# Altium PCB PCB2.PcbDoc
Units mil, origin at the board's own origin, x right, y up, seen from the top; angles counter-clockwise.
Board outline 2685 x 2175 mil, 2 copper layers (Top Layer, Bottom Layer); 49 components, 31 nets, 131 pads, 0 vias.
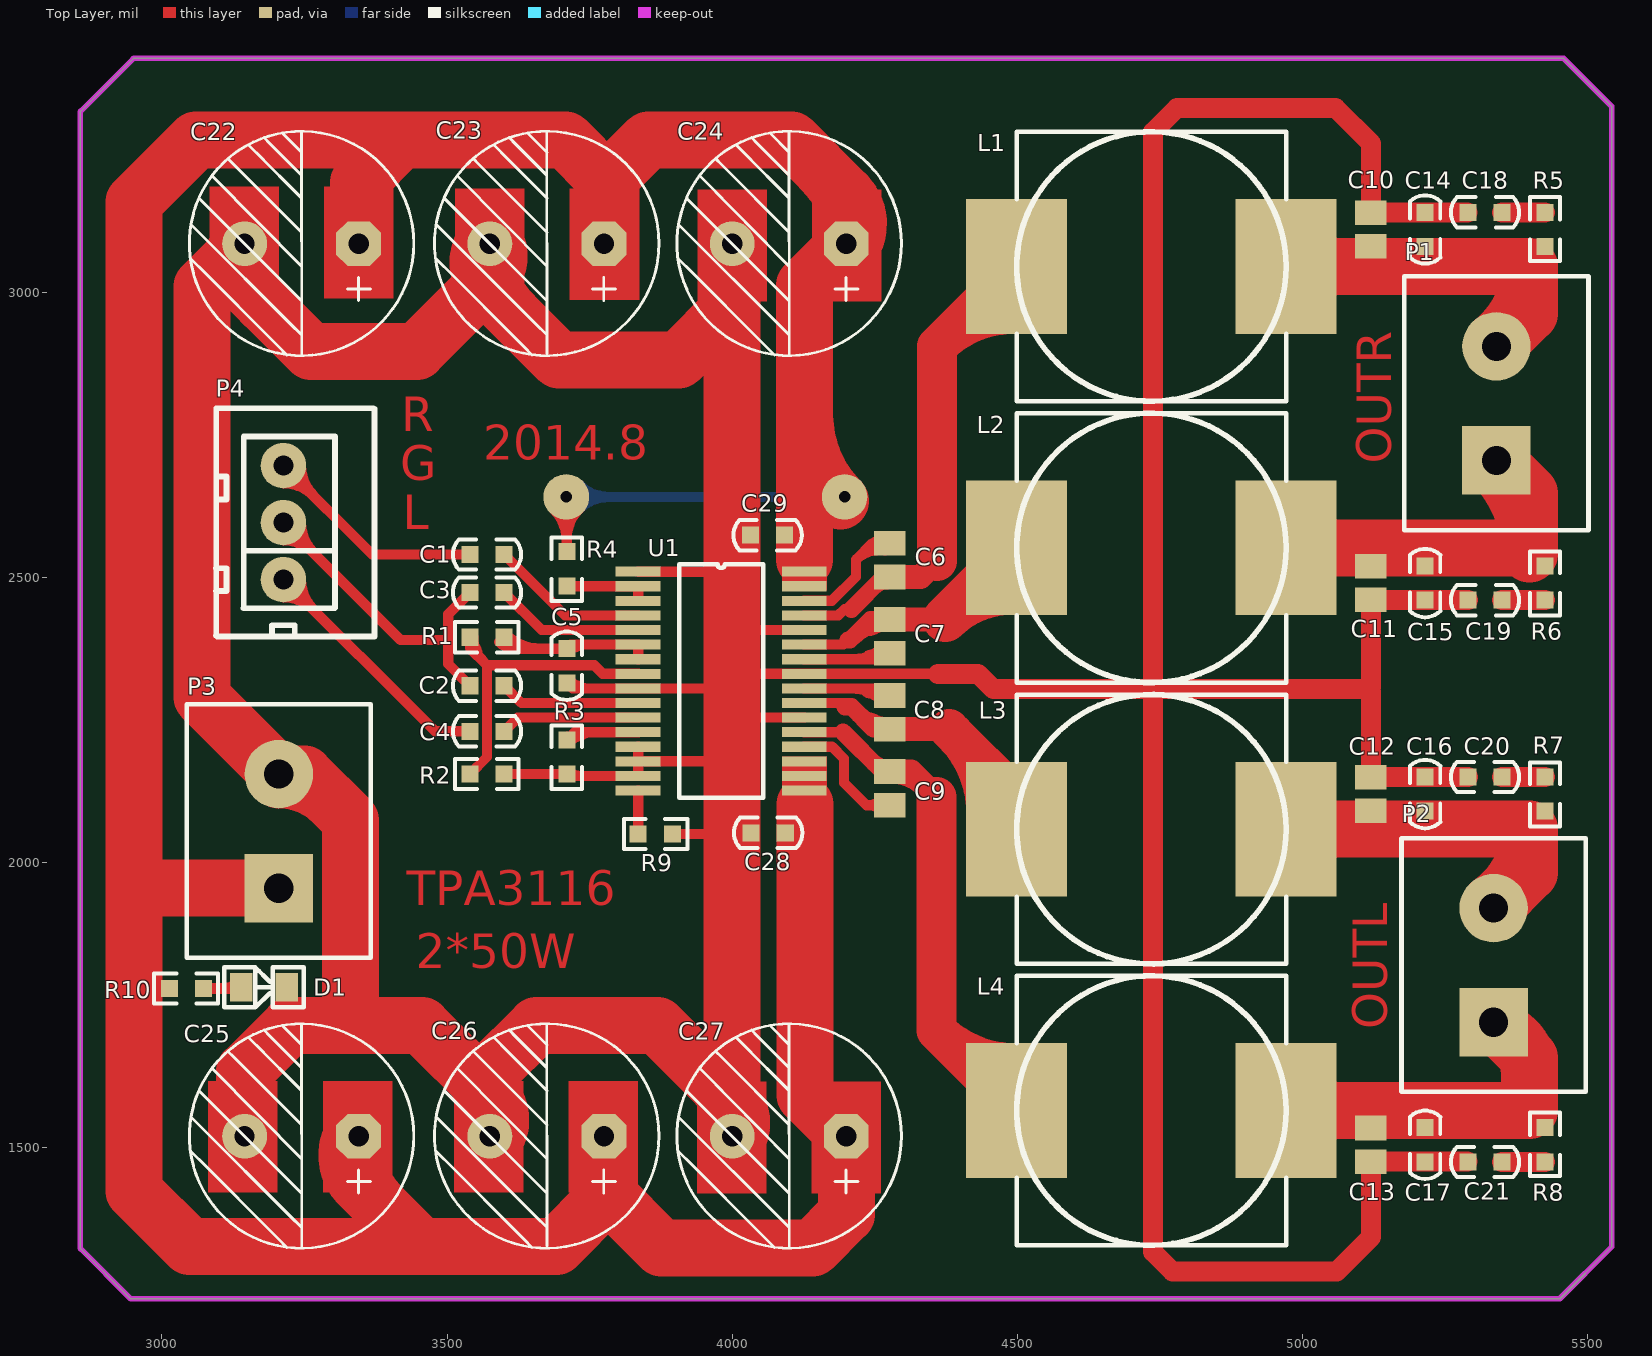
[diagram p0: Top Layer view]
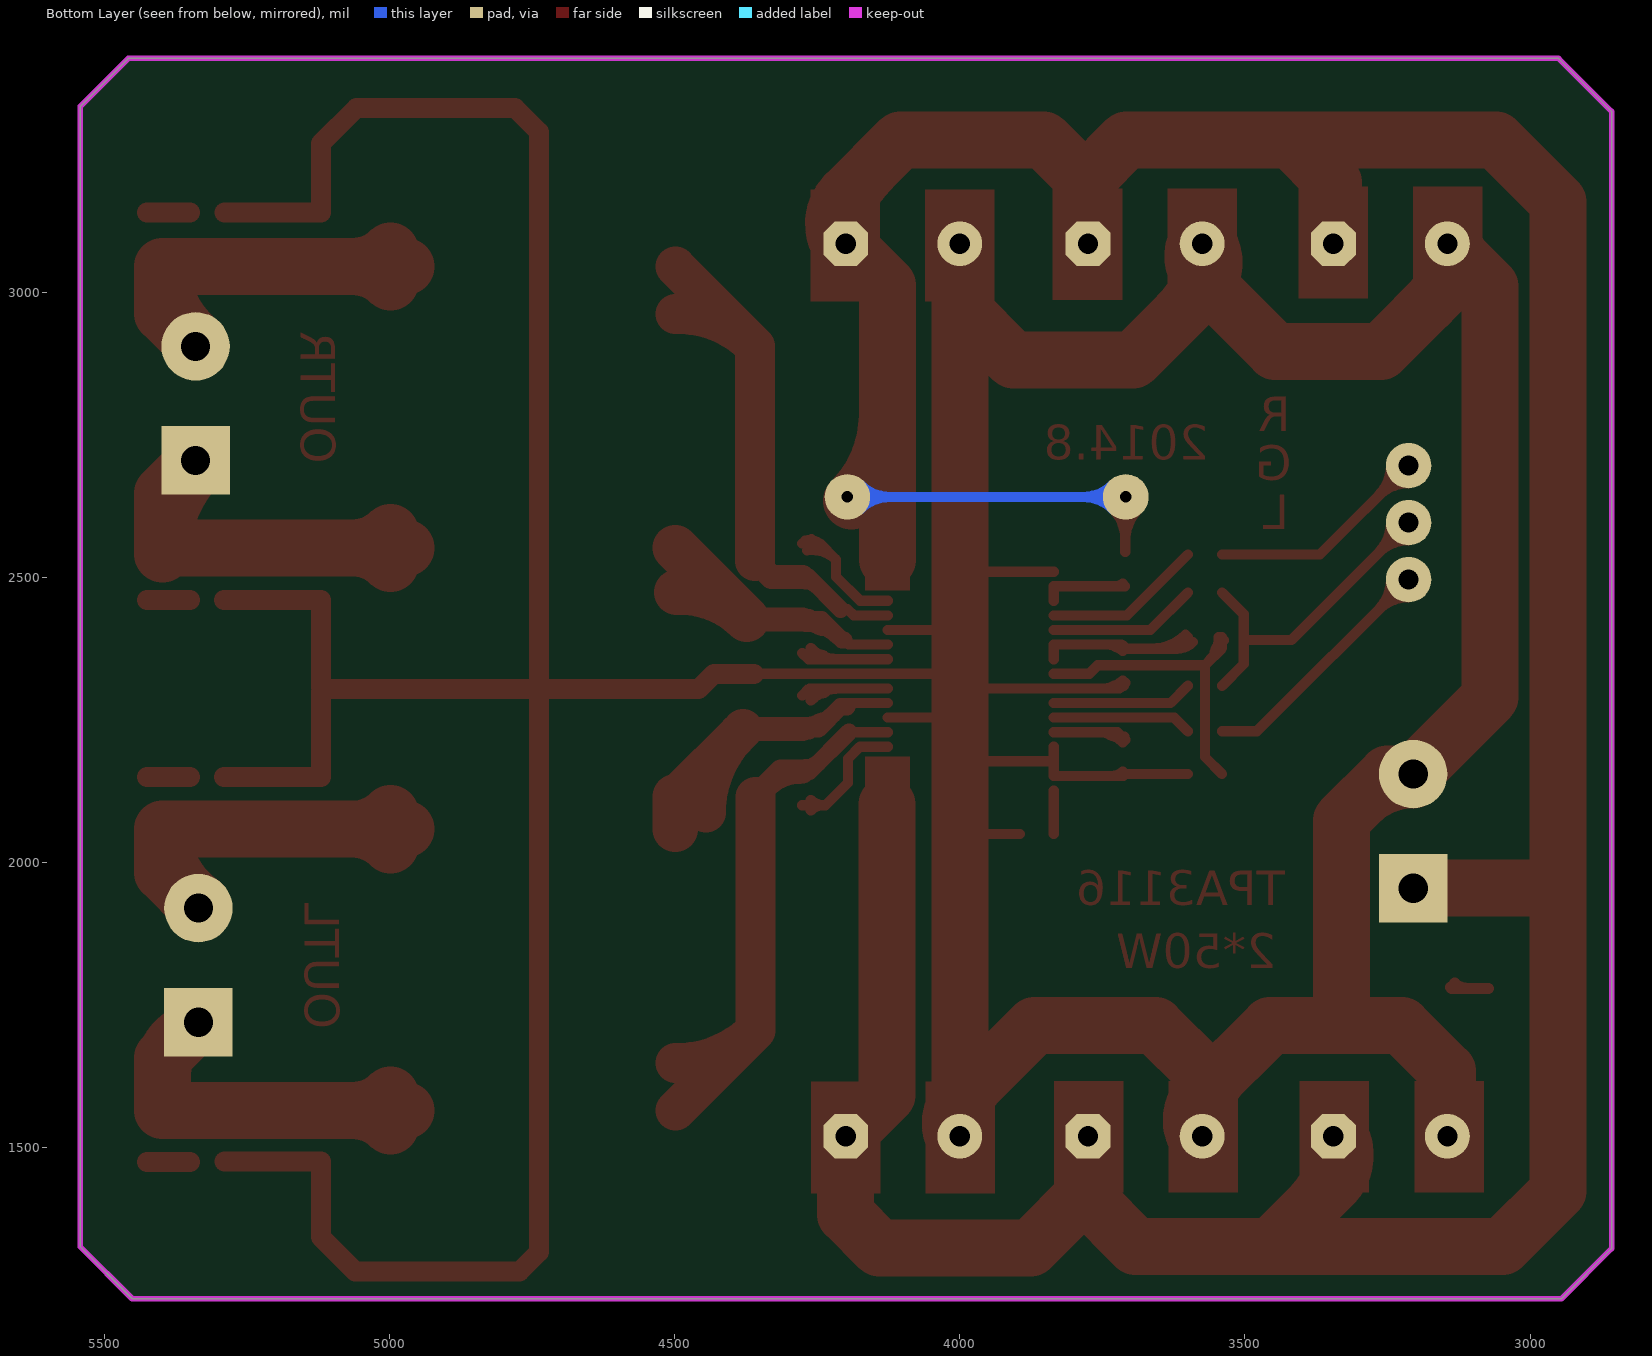
[diagram p1: Bottom Layer view, seen from below]
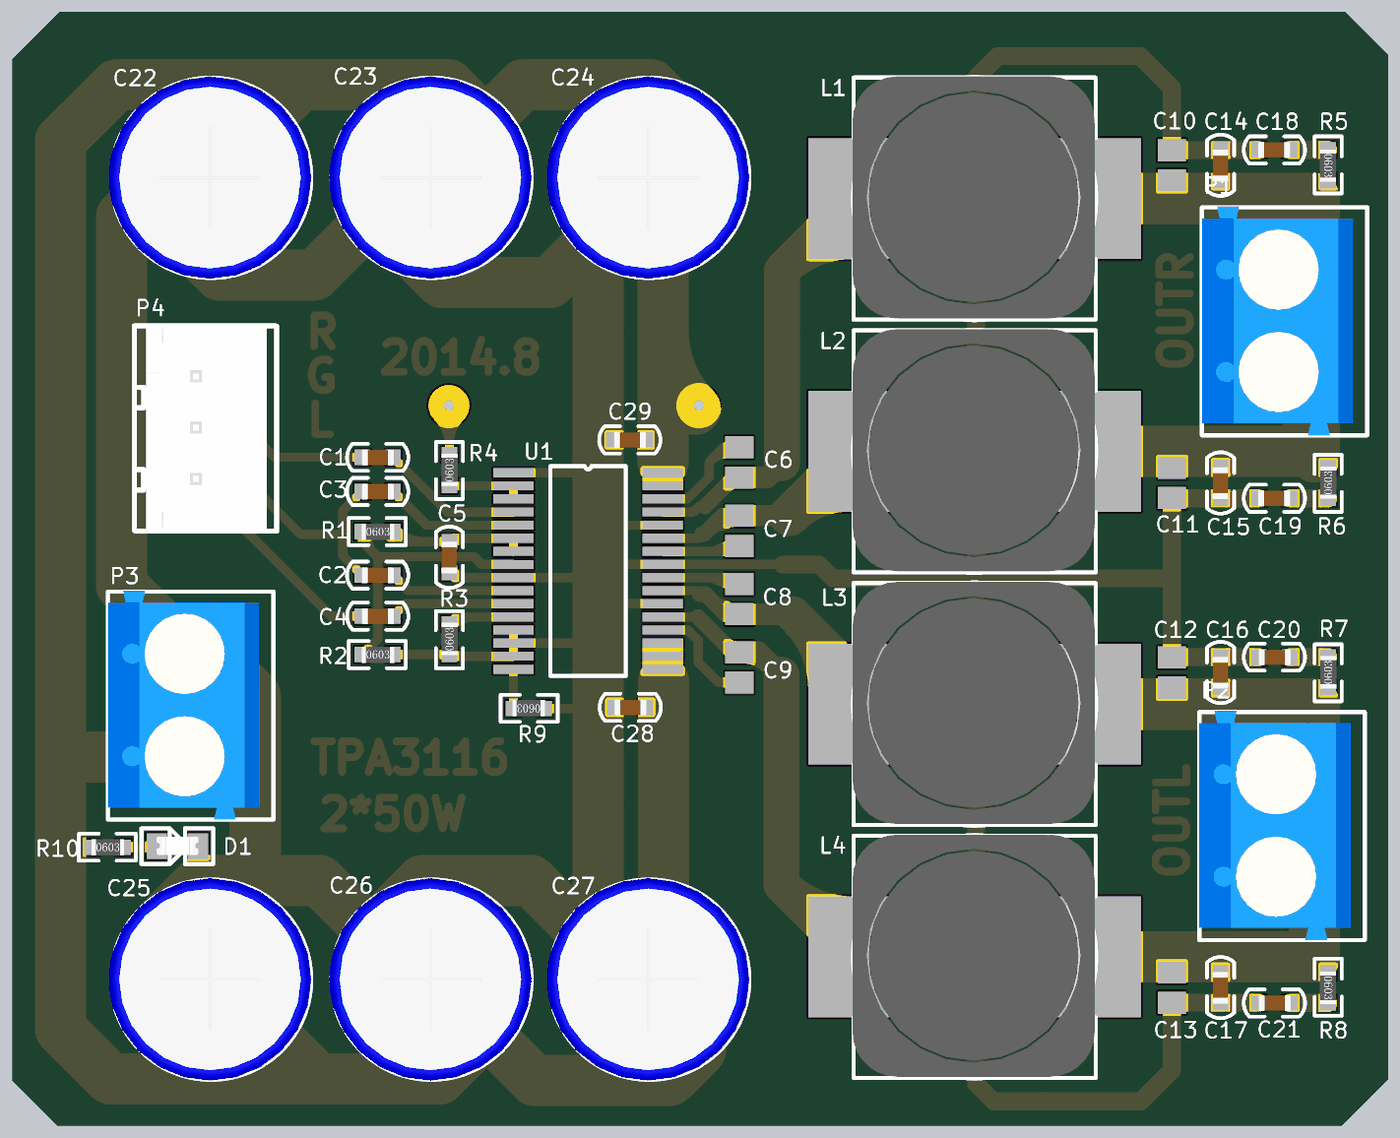
[diagram p2: 3D render of the assembled board from above, using the file's embedded part models]

## Layer stack, top to bottom
Top Solder: solder mask 0.4, Solder Resist, Dk 3.5
Top Layer: signal copper 1.4
Dielectric 1: dielectric 12.6, FR-4, Dk 4.8
Bottom Layer: signal copper 1.4
Bottom Solder: solder mask 0.4, Solder Resist, Dk 3.5

## Board outline
2857,1323 2945,1235 5451,1235 5542,1326 5542,3326 5458,3410 2950,3410 2857,3317

## Design rules (kind name [scope] priority, off if disabled: settings)
Clearance [All] p1: gap=5
PolygonConnect [All] p1: connectstyle=Relief reliefconductorwidth=10 reliefentries=4 polygonreliefangle="90 Angle" airgapwidth=10
RoutingVias [All] p1: holewidth=28 width=50 viastyle="Through Hole" minholewidth=28 minwidth=50 maxholewidth=28 maxwidth=50
SolderMaskExpansion [All] p1: expansion=4
Width [All] p1: maxlimit=500 minlimit=10 preferedwidth=20 minimp=50.000000 maximp=50.000000 favimp=50.000000
30 further rules are at their usual default settings.

## Components (designator, comment, footprint, x,y, rotation, side; value= is the part's Value field where it differs from the comment)
C1 "Cap Pol1" C0603 3540,2540 r0 top
C2 "Cap Pol1" C0603 3540,2310 r0 top
C3 "Cap Pol1" C0603 3540,2473.33 r0 top
C4 "Cap Pol1" C0603 3540,2230 r0 top
C5 "Cap Pol1" C0603 3710,2375 r270 top
C6 "Cap" C0805 4276,2530 r270 top
C7 "Cap" C0805 4276,2396.67 r90 top
C8 "Cap" C0805 4276,2263.33 r270 top
C9 "Cap" C0805 4276,2130 r90 top
C10 "Cap" C0805 5120,3110 r270 top
C11 "Cap" C0805 5120,2490 r270 top
C12 "Cap" C0805 5120,2120 r270 top
C13 "Cap" C0805 5120,1505 r270 top
C14 "Cap" C0603 5215,3140 r270 top
C15 "Cap" C0603 5215,2520 r270 top
C16 "Cap" C0603 5215,2150 r270 top
C17 "Cap" C0603 5215,1535 r270 top
C18 "Cap" C0603 5350,3140 r180 top
C19 "Cap" C0603 5350,2460 r180 top
C20 "Cap" C0603 5290,2150 r0 top
C21 "Cap" C0603 5290,1475 r0 top
C22 "Cap Pol1" EC-470/25 3345,3085 r270 top
C23 "Cap Pol1" EC-470/25 3775,3085 r270 top
C24 "Cap Pol1" EC-470/25 4200,3085 r270 top
C25 "Cap Pol1" EC-470/25 3345,1520 r270 top
C26 "Cap Pol1" EC-470/25 3775,1520 r270 top
C27 "Cap Pol1" EC-470/25 4200,1520 r270 top
C28 "Cap" C0603 4033,2052 r0 top
C29 "Cap" C0603 4032,2574 r0 top
D1 "LED0" D0805 3139,1781 r0 top
L1 "Inductor" L-12*12mm-S 4735,3045 r0 top
L2 "Inductor" L-12*12mm-S 4735,2551.67 r0 top
L3 "Inductor" L-12*12mm-S 4735,2058.33 r0 top
L4 "Inductor" L-12*12mm-S 4735,1565 r0 top
P1 "Header 2" HX5.08-2 5340,2705 r90 top
P2 "Header 2" HX5.08-2 5335,1720 r90 top
P3 "Header 2" HX5.08-2 3205,1955 r90 top
P4 "Header 3" HX2.54-3 3213,2496 r90 top
R1 "Res2" R0603 3540,2395 r0 top
R2 "Res2" R0603 3540,2155 r0 top
R3 "Res2" R0603 3710,2155 r90 top
R4 "Res2" R0603 3710,2485 r90 top
R5 "Res2" R0603 5425,3140 r270 top
R6 "Res2" R0603 5425,2460 r90 top
R7 "Res2" R0603 5425,2090 r90 top
R8 "Res2" R0603 5425,1535 r270 top
R9 "Res2" R0603 3895,2050 r180 top
R10 "Res2" R0603 3013,1779 r0 top
U1 "TPA3116" HTSSOP32 3835,2510 r0 top

## Footprints (in the part's own frame and the unit in brackets; to place one, negate y for a bottom-side part, rotate by r counter-clockwise, add the part's x,y. Pads: shape width x height; smd on the part's side, far side on the other; paste and mask are expansions set on the pad)
C0603 [mil]
  rect 30x30 smd: 1(0,0) 2(60,0)
  silkscreen extent -30,-27 90,27, body extent -1,-16 62,15, height 24
C0805 [mm] "Chip Capacitor, Body 2.0x1.3mm, IPC High Density"
  rect 1.1x1.4 smd: 1(-0.75,0) 2(0.75,0)
  body extent -1.1,-0.72 1.1,0.72, height 1.4
D0805 [mil]
  rect 40x50 smd: A(0,0) K(80,0)
  silkscreen extent -30,-35 110,35, body extent 0,-17 81,19, height 33
EC-470/25 [mm]
  oct 2x2 hole 0.9: 1(0,0)
  round 2 hole 0.9: 2(0,-5.08)
  silkscreen extent -5.01,-7.54 4.99,2.45, body extent -5.05,-7.62 5,2.43, height 16.53
HTSSOP32 [mm]
  rect 2x0.45 smd: 1(0,0) 2(0,-0.65) 3(0,-1.3) 4(0,-1.95) 5(0,-2.6) 6(0,-3.25) 7(0,-3.9) 8(0,-4.55) 9(0,-5.2) 10(0,-5.85) 11(0,-6.5) 12(0,-7.15) 13(0,-7.8) 14(0,-8.45) 15(0,-9.1) 16(0,-9.75) 17(7.4,-9.75) 18(7.4,-9.1) 19(7.4,-8.45) 20(7.4,-7.8) 21(7.4,-7.15) 22(7.4,-6.5) 23(7.4,-5.85) 24(7.4,-5.2) 25(7.4,-4.55) 26(7.4,-3.9) 27(7.4,-3.25) 28(7.4,-2.6) 29(7.4,-1.95) 30(7.4,-1.3) 31(7.4,-0.65) 32(7.4,0)
  silkscreen extent 1.84,-10.08 5.57,0.33
HX2.54-3 [mil]
  round 80 hole 35.43: 1(0,0) 2(100,0) 3(200,0)
  silkscreen extent -100,-160 300,118, body extent -95,-141 299,95, height 276
HX5.08-2 [mil]
  rect 120x120 hole 51.18: 1(0,0)
  round 120 hole 51.18: 2(200,0)
  silkscreen extent -122,-161 323,161, body extent -122,-134 325,161, height 91
L-12*12mm-S [mm]
  rect 4.5x6 smd: 1(-6,0) 2(6,0)
  silkscreen extent -6,-6 6,6, body extent -6.05,-5.94 5.95,6.06, height 8
R0603 [mil]
  rect 30x30 smd: 1(0,0) 2(60,0)
  silkscreen extent -26,-26 85,26, body extent -1,-16 62,15, height 18

## Part data
C1 C2 C3 C4 C5 C22 C23 C24 C25 C26 C27: "Polarized Capacitor (Radial)"
C6 C7 C8 C9 C10 C11 C12 C13 C14 C15 C16 C17 C18 C19 C20 C21 C28 C29: "Capacitor"
D1: "Typical INFRARED GaAs LED"
P1 P2 P3: "Header, 2-Pin"
P4: "Header, 3-Pin"
R1 R2 R3 R4 R5 R6 R7 R8 R9 R10: "Resistor"

## Free pads (board coordinates)
  round 80 hole 20: 0(3709,2641) 1(4197,2641)

## Nets (pads, with @x,y where several pads share a name; then routed paths per layer and width w, separated by ;. In a path a pad name is that pad's centre, name@x,y a point inside that pad or via, vN(x,y) a via of type N, cw(c..) or ccw(c..) an arc to the next point about the centre after c; other vN are vias at no path point)
GND: C5.2 C10.1 C11.2 C12.1 C13.2 C14.1 C15.2 C16.1 C17.2 C18.2 C19.2 C20.1 C21.1 C22.2 C23.2 C24.2 C25.2 C26.2 C27.2 C28.1 C29.1 D1.K P3.2 R2.2 R3.1 R9.1 U1.1 U1.9 U1.13 U1.14 U1.15 U1.22 U1.25 U1.28 | length 14321.6
  Top Layer w18: R2.2 R3.1 3713.27,2151.73 U1.15 U1.14 ; C5.2 3719.72,2305.28 U1.9 3977.32,2305.28 ; C5.2@3712.49,2309.54 cw(c3721.67,2289.43) 3732.72,2308.57 ; U1.13 U1.14 ; U1.1 3965,2510 4000,2475 ; R9.1 3996,2050 4000,2046 ; 4000,2200 3977.32,2177.32 U1.14 ; 4002.91,2254.09 U1.22 ; 4002.91,2330.87 U1.25 4361,2330.87 ; 4002.91,2407.64 U1.28 ; R3.1@3714.24,2159.24 ccw(c3732.38,2177.38) 3732.38,2151.73 cw(c3732.38,2177.38) R3.1@3714.24,2159.24 ; C5.2@3714.24,2319.24 ccw(c3747.96,2352.96) 3747.96,2305.28 cw(c3747.96,2352.96) C5.2@3714.24,2319.24
  Top Layer w35: 4361,2330.87 4431.13,2330.87 4458,2304 4738,2304 ; C12.1 5120,2300 5116,2304 ; C11.2 5120,2308 5116,2304 ; C12.1@5120.47,2150 C16.1 C20.1 ; C11.2@5120.47,2460 C15.2 C19.2 ; C21.1@5289.53,1475.47 C13.2 5120,1343 5060,1283 4772,1283 4738,1317 4738,2304 ; C18.2@5289.53,3139.53 C10.1 5120,3261 5058,3323 4780,3323 4738,3281 4738,2304 ; 4738,2304 5116,2304
  Top Layer w100: C25.2 3145,1634 3225,1714 3331,1714 ; C26.2 3575,1595 ; C23.2 3575,3024 ; C27.2 4000,1583 ; C24.2 4000,2975 ; 3145,3012 cw(c3189.99,3056.99) 3135.98,3090.62 ccw(c3189.99,3056.99) 3145,3012 ; 3145,3012 C22.2 3070,3010 3070,2290 P3.2 3250,2155 3331,2074 3331,1714 ; 3145,3012 3261,2896 3447,2896 3575,3024 ; 3331,1714 3456,1714 3575,1595 ; 3575,1595 cw(c3529.04,1549.04) 3583.99,1514.32 ccw(c3529.04,1549.04) 3575,1595 ; 3575,1595 3575,1632 3657,1714 3869,1714 4000,1583 ; 3575,3002 cw(c3624.85,3051.85) 3566.15,3090.89 ccw(c3624.85,3051.85) 3575,3002 ; 3575,3002 3696,2881 3906,2881 4000,2975 ; 3575,3002 3575,3024 ; 3575,3024 ccw(c3535.76,3063.25) 3584.3,3090.15 cw(c3535.76,3063.25) 3575,3024 ; 4000,1583 cw(c3959.81,1542.81) 4009.25,1514.75 ccw(c3959.81,1542.81) 4000,1583 ; 4000,1583 4000,2046 4000,2200 4000,2475 4000,2975 ; C22.2@3134.37,3085 ccw(c3284.94,3085) 3178.47,2978.53 cw(c3284.94,3085) C22.2@3134.37,3085 ; P3.2@3205,2145 cw(c3205,2012.22) 3298.89,2106.11 ccw(c3205,2012.22) P3.2@3205,2145 ; 3540.11,1629.89 cw(c3430.23,1520) 3585.63,1520 ccw(c3430.23,1520) 3540.11,1629.89 ; 3550.01,2999.01 ccw(c3464.03,3085) 3585.63,3085 cw(c3464.03,3085) 3550.01,2999.01 ; C23.2@3564.37,3085 ccw(c3739.09,3085) 3615.54,2961.46 cw(c3739.09,3085) C23.2@3564.37,3085 ; 3973.6,1609.4 cw(c3884.2,1520) 4010.63,1520 ccw(c3884.2,1520) 3973.6,1609.4
NetC1_1: C1.1 P4.3 | length 509.2
  Top Layer w18: P4.3@3213,2665 cw(c3213,2590.16) 3265.92,2643.08 cw(c3318.84,2696) P4.3@3244,2696 ; P4.3 3369,2540 C1.1
NetC1_2: C1.2 U1.4 | length 279.2
  Top Layer w18: C1.2 3706.77,2433.23 U1.4
NetC2_1: C2.1 C3.1 P4.2 | length 686.7
  Top Layer w18: P4.2@3213,2565 cw(c3213,2490.16) 3265.92,2543.08 cw(c3318.84,2596) P4.2@3244,2596 ; P4.2 3419,2390 3502,2390 ; C2.1 3502,2348 3502,2390 ; C3.1 3502,2435.33 3502,2390
NetC2_2: C2.2 U1.10 | length 247.6
  Top Layer w18: C2.2 3630.32,2279.68 U1.10
NetC3_2: C3.2 U1.5 | length 262.2
  Top Layer w18: C3.2 3665.7,2407.64 U1.5
NetC4_1: C4.1 P4.1 | length 554.7
  Top Layer w18: P4.1@3213,2465 cw(c3213,2390.16) 3265.92,2443.08 cw(c3318.84,2496) P4.1@3244,2496 ; P4.1 3479,2230 C4.1
NetC4_2: C4.2 U1.11 | length 245
  Top Layer w18: C4.2 3624.09,2254.09 U1.11
NetC5_1: C5.1 R1.2 U1.6 U1.7 | length 444.2
  Top Layer w18: R1.2@3591.51,2386.51 ccw(c3619.31,2414.31) 3619.31,2375 ; R1.2 3620,2375 C5.1 3717.05,2382.05 U1.6 U1.7 ; R1.2@3604.24,2399.24 ccw(c3662.77,2457.77) 3662.77,2375 ; C5.1@3713.53,2379.85 ccw(c3721.69,2391.08) 3728.62,2379.06 ; C5.1@3714.24,2370.76 cw(c3741.5,2343.5) 3741.5,2382.05 ccw(c3741.5,2343.5) C5.1@3714.24,2370.76
NetC6_1: C6.1 U1.30 | length 451
  Top Layer w18: U1.30 4174.82,2458.82 4217,2501 4217,2531 ; C6.1 4245.53,2559.53 ; 4217,2531 cw(c4257.89,2490.11) 4267.9,2547.07 ccw(c4257.89,2490.11) 4217,2531 ; 4217,2531 4245.53,2559.53 ; 4245.53,2559.53 ccw(c4245.53,2577.05) 4259.79,2566.87 cw(c4245.53,2577.05) 4245.53,2559.53 ; 4245.53,2559.53 cw(c4245.53,2542.01) 4259.79,2552.18 ccw(c4245.53,2542.01) 4245.53,2559.53 ; 4241.47,2555.47 cw(c4265.21,2531.73) 4271.02,2564.79 ccw(c4265.21,2531.73) 4241.47,2555.47
NetC6_2: C6.2 L1.1 U1.29 | length 1197.6
  Top Layer w18: U1.29 4186.23,2433.23 4197,2444 4209,2444
  Top Layer w30: 4209,2444 4265.47,2500.47 C6.2 ; C6.2@4250.85,2485.85 cw(c4270.09,2466.6) 4270.09,2493.82 ccw(c4270.09,2466.6) C6.2@4250.85,2485.85
  Top Layer w42: C6.2 4330.47,2500.47 4359,2529
  Top Layer w70: 4359,2529 4359,2905.22 L1.1 ; 4359.01,2905.23 cw(c4495.84,2768.39) 4498.14,2961.89 ccw(c4495.84,2768.39) 4359.01,2905.23
NetC7_1: C7.1 U1.26 | length 285.1
  Top Layer w18: U1.26 4265.32,2356.46 C7.1 ; 4237.21,2362.27 cw(c4246.71,2345.82) C7.1@4260.74,2358.62 ; 4213.76,2356.46 ccw(c4213.76,2423.48) 4261.15,2376.09 cw(c4213.76,2423.48) 4213.76,2356.46
NetC7_2: C7.2 L2.1 U1.27 | length 873.1
  Top Layer w18: U1.27 4195.05,2382.05 4203,2390
  Top Layer w30: 4203,2390 4206.54,2390 4242.73,2426.19 C7.2 ; 4241.26,2411.81 ccw(c4231.42,2448.52) C7.2@4264.33,2429.52 ; 4212.03,2395.49 cw(c4270.09,2337.42) 4270.09,2419.54 ccw(c4270.09,2337.42) 4212.03,2395.49
  Top Layer w42: C7.2 4373.31,2426.19
  Top Layer w80: L2.1 4373.31,2426.19 ; 4373.31,2426.2 cw(c4488.27,2311.24) 4496.36,2473.62 ccw(c4488.27,2311.24) 4373.31,2426.2
NetC8_1: C8.1 U1.24 | length 298.4
  Top Layer w18: U1.24 4263.59,2305.28 C8.1 ; 4234.56,2299.26 ccw(c4246.05,2319.16) C8.1@4261.56,2302.2 ; 4209.58,2305.28 cw(c4209.58,2232.34) 4261.15,2283.91 ccw(c4209.58,2232.34) 4209.58,2305.28
NetC8_2: C8.2 L3.1 U1.23 | length 942.5
  Top Layer w18: U1.23 4191.32,2279.68 4198,2273
  Top Layer w30: 4198,2273 4209,2273 4248.19,2233.81 C8.2 ; 4241.26,2248.19 cw(c4231.42,2211.48) C8.2@4264.33,2230.48 ; 4221.35,2260.65 ccw(c4270.09,2309.39) 4270.09,2240.46 cw(c4270.09,2309.39) 4221.35,2260.65
  Top Layer w42: C8.2 4380.19,2233.81
  Top Layer w70: 4380.19,2233.81 L3.1@4498.78,2115.22 ; 4387.96,2226.04 cw(c4249.78,2087.86) 4445.2,2087.86 ccw(c4249.78,2087.86) 4387.96,2226.04
  Top Layer w80: L3.1 L3.1@4498.78,2115.22
NetC9_1: C9.1 U1.20 | length 312.7
  Top Layer w18: U1.20 4175.09,2202.91 4196,2182 4196,2140 4235.53,2100.47 C9.1 ; 4239.55,2100.47 ccw(c4239.55,2131.02) 4261.15,2109.42 cw(c4239.55,2131.02) 4239.55,2100.47 ; 4239.55,2100.47 cw(c4239.55,2069.92) 4261.15,2091.53 ccw(c4239.55,2069.92) 4239.55,2100.47
NetC9_2: C9.2 L4.1 U1.21 | length 1371.2
  Top Layer w18: U1.21 4194.5,2228.5
  Top Layer w30: 4194.5,2228.5 4263.47,2159.53 C9.2 ; 4247.43,2175.57 ccw(c4270.09,2198.23) 4270.09,2166.18 cw(c4270.09,2198.23) 4247.43,2175.57
  Top Layer w42: C9.2 4313.47,2159.53 4358,2115 ; C9.2@4281.91,2158.87 cw(c4281.91,2081.09) 4336.91,2136.09 ccw(c4281.91,2081.09) C9.2@4281.91,2158.87
  Top Layer w70: 4358,2115 4358,1705.78 L4.1 ; 4358.01,1705.77 ccw(c4497.23,1844.99) 4498.45,1648.11 cw(c4497.23,1844.99) 4358.01,1705.77
NetC10_2: C10.2 C14.2 L1.2 P1.2 R5.2 | length 1187.5
  Top Layer w100: L1.2 5398,3045 ; P1.2 5398,2963 5398,3045 ; 5064.37,3045 ccw(c5064.37,2951.85) 4998.5,3017.72 cw(c5064.37,2951.85) 5064.37,3045 ; 5064.37,3045 cw(c5064.37,3138.15) 4998.5,3072.28 ccw(c5064.37,3138.15) 5064.37,3045 ; 5398,3044.99 cw(c5229.9,3044.99) 5333.82,2912.86 ccw(c5229.9,3044.99) 5398,3044.99
NetC11_1: C11.1 C15.1 L2.2 P1.1 R6.2 | length 1071.8
  Top Layer w100: L2.2 5398.33,2551.67 5398.33,2646.67 P1.1 ; P1.1@5332.96,2697.9 cw(c5177.25,2540.95) 5398.33,2540.95 ; 5064.37,2551.67 ccw(c5064.37,2458.52) 4998.5,2524.38 cw(c5064.37,2458.52) 5064.37,2551.67 ; 5064.37,2551.67 cw(c5064.37,2644.81) 4998.5,2578.95 ccw(c5064.37,2644.81) 5064.37,2551.67
NetC12_2: C12.2 C16.2 L3.2 P2.2 R7.1 | length 1115.9
  Top Layer w100: L3.2 5397.67,2058.33 ; L3.2@4998.5,2031.05 cw(c5064.37,1965.19) 5064.37,2058.33 ; P2.2 5397.67,1982.67 5397.67,2058.33 ; 5064.37,2058.33 cw(c5064.37,2151.48) 4998.5,2085.62 ccw(c5064.37,2151.48) 5064.37,2058.33 ; 5397.67,2058.33 cw(c5239.67,2058.33) 5329.33,1928.23 ccw(c5239.67,2058.33) 5397.67,2058.33
NetC13_1: C13.1 C17.1 L4.2 P2.1 R8.1 | length 1122.5
  Top Layer w100: L4.2 5398,1565 5398,1657 P2.1 ; 5064.37,1565 ccw(c5064.37,1471.85) 4998.5,1537.72 cw(c5064.37,1471.85) 5064.37,1565 ; 5064.37,1565 cw(c5064.37,1658.15) 4998.5,1592.28 ccw(c5064.37,1658.15) 5064.37,1565 ; P2.1@5333.03,1710.2 cw(c5317.13,1630.91) 5398,1630.91 ccw(c5317.13,1630.91) P2.1@5333.03,1710.2
NetC18_1: C18.1 R5.1 | length 75
  Top Layer w35: C18.1 R5.1
NetC19_1: C19.1 R6.1 | length 75
  Top Layer w35: C19.1 R6.1
NetC20_2: C20.2 R7.2 | length 75
  Top Layer w35: C20.2 R7.2
NetC21_2: C21.2 R8.2 | length 75
  Top Layer w35: C21.2 R8.2
NetD1_1: D1.A R10.2 | length 115.5
  Top Layer w20: R10.2 3137,1779 D1.A ; 3110.03,1779 ccw(c3110.03,1809.97) 3131.93,1788.07 cw(c3110.03,1809.97) 3110.03,1779
NetR1_1: R1.1 R2.1 U1.8 | length 657.8
  Top Layer w18: R1.1@3537,2389.8 cw(c3519.86,2360.12) 3552.97,2368.99 ; R2.1 3570,2185 3570,2346 ; R1.1 3540,2376 3570,2346 ; U1.8 3773.13,2330.87 3758,2346 3570,2346 ; R1.1@3546,2395 ccw(c3606.36,2395) 3563.68,2352.32 cw(c3606.36,2395) R1.1@3546,2395
NetR3_2: R3.2 U1.12 | length 252.7
  Top Layer w18: R3.2 3723.5,2228.5 U1.12 ; R3.2@3711.55,2220.8 ccw(c3720.42,2253.9) 3737.56,2224.22 ; R3.2@3714.24,2210.76 cw(c3757.09,2167.91) 3757.09,2228.5 ccw(c3757.09,2167.91) R3.2@3714.24,2210.76
NetR4_1: R4.1 U1.2 U1.3 | length 175.9
  Top Layer w18: R4.1@3710.59,2484.41 U1.2 U1.3 ; R4.1@3714.24,2489.24 ccw(c3725.91,2500.91) 3725.91,2484.41 cw(c3725.91,2500.91) R4.1@3714.24,2489.24
NetR9_2: R9.2 U1.16 | length 76.1
  Top Layer w18: R9.2 U1.16
VCC: C22.1 C23.1 C24.1 C25.1 C26.1 C27.1 C28.2 C29.2 P3.1 pad.0 pad.1 R4.2 R10.1 U1.17 U1.18 U1.19 U1.31 U1.32 | length 9517.6
  Top Layer w18: pad.0 3710,2640 R4.2 ; pad.0@3687.08,2619.08 cw(c3631.75,2563.75) 3710,2563.75 ccw(c3631.75,2563.75) pad.0@3687.08,2619.08 ; 3710,2568.57 cw(c3781.43,2568.57) 3730.92,2619.08 ccw(c3781.43,2568.57) 3710,2568.57
  Top Layer w100: P3.1 2965,1955 2951,1969 ; C25.1 3345,1436 ; C22.1 3345,3192 3420,3267 ; C26.1 3775,1425 ; C23.1 3775,3189 3776,3190 ; 3776,3132 3776,3190 ; 4127,2531 4127,3012 C24.1 4200,3171 ; 4128,2102 4128,1592 C27.1 4200,1383 4141,1324 3876,1324 3775,1425 ; 2951,1969 2951,1424 3048,1327 3454,1327 ; 2951,1969 2951,3158 3060,3267 3420,3267 ; 3345,1436 cw(c3395.33,1486.34) 3336.16,1525.91 ccw(c3395.33,1486.34) 3345,1436 ; 3345,1436 3454,1327 ; 3420,3267 3708,3267 3776,3199 3776,3190 ; 3454,1327 3692,1327 3775,1410 3775,1425 ; 3776,3190 3853,3267 4104,3267 4200,3171 ; 4200,3171 cw(c4148.69,3119.69) 4208.81,3079.05 ccw(c4148.69,3119.69) 4200,3171 ; C25.1@3334.37,1520 ccw(c3511.5,1520) 3386.25,1394.75 cw(c3511.5,1520) C25.1@3334.37,1520 ; 4127,2785.85 ccw(c4341.85,2785.85) 4189.93,2633.93 cw(c4341.85,2785.85) 4127,2785.85 ; 4157.34,3213.66 cw(c4028.67,3085) 4210.63,3085 ccw(c4028.67,3085) 4157.34,3213.66
  Bottom Layer w18: pad.0 pad.1 ; 3783.84,2641 ccw(c3783.84,2566.16) 3730.92,2619.08 cw(c3783.84,2566.16) 3783.84,2641 ; 3783.84,2641 cw(c3783.84,2715.84) 3730.92,2662.92 ccw(c3783.84,2715.84) 3783.84,2641 ; 4122.16,2641 ccw(c4122.16,2715.84) 4175.08,2662.92 cw(c4122.16,2715.84) 4122.16,2641 ; 4122.16,2641 cw(c4122.16,2566.16) 4175.08,2619.08 ccw(c4122.16,2566.16) 4122.16,2641

## Keep-outs
Keep-Out Layer:
  the board outline again, w10

## Other copper
Top Layer:
  rectangle net GND: 3083,2989 3205,3185
  rectangle net VCC: 3284,2989 3406,3185
  rectangle net VCC: 3715,2986 3837,3182
  rectangle net GND: 3514,2986 3636,3182
  rectangle net VCC: 4140,2984 4262,3180
  rectangle net GND: 3939,2984 4061,3180
  rectangle net VCC: 3282,1421 3404,1617
  rectangle net GND: 3081,1421 3203,1617
  rectangle net VCC: 3713,1421 3835,1617
  rectangle net GND: 3512,1421 3634,1617
  rectangle net VCC: 4139,1420 4261,1616
  rectangle net GND: 3938,1420 4060,1616
  rectangle net VCC: 4087,2118 4166,2186
  rectangle net VCC: 4087,2477 4166,2518
  text "R" at 3420,2756 h60
  text "2014.8" at 3563,2706 h60
  text "OUTR" at 5156,2699 h60 r90
  text "G" at 3418,2670 h60
  text "L" at 3422,2584 h60
  text "TPA3116" at 3429,1925 h60
  text "2*50W" at 3445,1815 h60
  text "OUTL" at 5149,1708 h60 r90